# EAGLE board Atividade - Semáforo de cruzamento (EAGLE 9.7.0)

Size 156.79 x 68.76 mm. Coordinates in mm from the lower left corner, seen from the top.
Outline: 0,0 156.79,0 156.79,68.76 0,68.76 0,0
Copper layers (1*16): Top 0.035mm / dielectric 1.5mm / Bottom 0.035mm
Design rules "default": minimum track width 6mil, minimum drill 0.35mm, track to track 6mil, track to pad 6mil, pad to pad 6mil, via to via 6mil, smd to smd 6mil, copper to edge 40mil, drill to drill 6mil, minimum pad ring 10mil, minimum via ring 8mil, stop-mask expansion 4mil, vias tented up to drill 0mil, thermal gap 10mil

## Footprints (pad centres in the part's own frame; a part is rotated, then mirrored left to right if it is on the bottom)
LEDRD254W60D565H860B_G = drill 0.981 pad 1.581: 1 -1.27,0; 2 1.27,0
LEDRD254W60D565H860B_Y = drill 0.981 pad 1.581: 1 -1.27,0; 2 1.27,0
LEDRD254W60D565H860B = drill 0.981 pad 1.581: 1 -1.27,0; 2 1.27,0
RESAD1016W63L850D250B = drill 0.83 pad 1.43: 1 -5.08,0; 2 5.08,0
ARDUINO-UNO-R3-SHIELD = drill 1.016 pad 1.88: 3.3V 24.13,-2.54; 5V 24.13,0; A0 24.13,12.7; A1 24.13,15.24; A2 24.13,17.78; A3 24.13,20.32; A4 24.13,22.86; A5 24.13,25.4; AREF -24.13,-13.97; D2 -24.13,20.32; D3 -24.13,17.78; D4 -24.13,15.24; D5 -24.13,12.7; D6 -24.13,10.16; D7 -24.13,7.62; D8 -24.13,3.81; D9 -24.13,1.27; D10 -24.13,-1.27; D11 -24.13,-3.81; D12 -24.13,-6.35; D13 -24.13,-8.89; GND@0 24.13,2.54; GND@1 24.13,5.08; GND@2 -24.13,-11.43; IOREF 24.13,-7.62; NC 24.13,-10.16; RES 24.13,-5.08; RX -24.13,25.4; SCL -24.13,-19.05; SDA -24.13,-16.51; TX -24.13,22.86; VIN 24.13,7.62

## Placement (x,y rotation side)
D4  GREEN  [LEDRD254W60D565H860B_G]  140.2,62.7 270 top
D5  YELLOW  [LEDRD254W60D565H860B_Y]  137.66,57.62 270 top
D6  RED  [LEDRD254W60D565H860B]  135.12,52.54 270 top
D9  GREEN  [LEDRD254W60D565H860B_G]  140.2,37.3 270 top
D10  RED  [LEDRD254W60D565H860B]  140.2,32.22 270 top
DLEDPEDES1_VERDE  GREEN  [LEDRD254W60D565H860B_G]  119.88,37.3 270 top
DLEDPEDES1_VERMELHO  RED  [LEDRD254W60D565H860B]  119.88,32.22 270 top
DLEDSEMA1_AMARELO  YELLOW  [LEDRD254W60D565H860B_Y]  119.88,57.62 270 top
DLEDSEMA1_VERDE  GREEN  [LEDRD254W60D565H860B_G]  119.88,62.7 270 top
DLEDSEMA1_VERMELHO  RED  [LEDRD254W60D565H860B]  122.42,52.54 270 top
R2  220  [RESAD1016W63L850D250B]  112.26,61.43 180 top
R3  220  [RESAD1016W63L850D250B]  112.26,56.35 180 top
R4  220  [RESAD1016W63L850D250B]  112.26,51.27 180 top
R5  220  [RESAD1016W63L850D250B]  112.26,36.03 180 top
R6  220  [RESAD1016W63L850D250B]  112.26,30.95 180 top
R7  220  [RESAD1016W63L850D250B]  147.82,61.43 180 top
R8  220  [RESAD1016W63L850D250B]  147.82,56.35 180 top
R9  220  [RESAD1016W63L850D250B]  147.82,51.27 180 top
R10  220  [RESAD1016W63L850D250B]  147.82,36.03 180 top
R11  220  [RESAD1016W63L850D250B]  147.82,30.95 180 top
U1  ARDUINO-UNO-R3-SHIELD  [ARDUINO-UNO-R3-SHIELD]  47.88,29.84 270 top

## Library data of the parts
D4 D9 DLEDPEDES1_VERDE DLEDSEMA1_VERDE = Tinkercad; CATEGORY: Opto-Electronic; SUB-CATEGORY: LED; VALUE: LED_GREEN
D5 DLEDSEMA1_AMARELO = Tinkercad; CATEGORY: Opto-Electronic; SUB-CATEGORY: LED; VALUE: LED_YELLOW
D6 D10 DLEDPEDES1_VERMELHO DLEDSEMA1_VERMELHO = Tinkercad; CATEGORY: Opto-Electronic; SUB-CATEGORY: LED; VALUE: LED_RED
R2-R11 U1 = Tinkercad

## Nets
D4_C: D4.2 R7.2
D5_C: D5.2 R8.2
D6_C: D6.2 R9.2
D9_C: D9.2 R10.2
D10_C: D10.2 R11.2
DLEDPEDES1_VERDE_C: DLEDPEDES1_VERDE.2 R5.1
DLEDPEDES1_VERMELHO_C: DLEDPEDES1_VERMELHO.2 R6.1
DLEDSEMA1_AMARELO_C: DLEDSEMA1_AMARELO.2 R3.1
DLEDSEMA1_VERDE_C: DLEDSEMA1_VERDE.2 R2.1
DLEDSEMA1_VERMELHO_C: DLEDSEMA1_VERMELHO.2 R4.1
U1_D2: DLEDSEMA1_VERDE.1 U1.D2
U1_D3: DLEDSEMA1_AMARELO.1 U1.D3
U1_D4: DLEDSEMA1_VERMELHO.1 U1.D4
U1_D5: DLEDPEDES1_VERDE.1 U1.D5
U1_D6: DLEDPEDES1_VERMELHO.1 U1.D6
U1_D7: D4.1 U1.D7
U1_D8: D5.1 U1.D8
U1_D9: D6.1 U1.D9
U1_D10: D9.1 U1.D10
U1_D11: D10.1 U1.D11
U1_GND: R2.2 R3.2 R4.2 R5.2 R6.2 R7.1 R8.1 R9.1 R10.1 R11.1 U1.GND@0 U1.GND@1 U1.GND@2

## Tracks (layer width: path | path; a pad name or v marks a point on that pad's centre or on a via)
D4_C  (1 unrouted)
D5_C  (1 unrouted)
D6_C  (1 unrouted)
D9_C  (1 unrouted)
D10_C  (1 unrouted)
DLEDPEDES1_VERDE_C  (1 unrouted)
DLEDPEDES1_VERMELHO_C  (1 unrouted)
DLEDSEMA1_AMARELO_C  (1 unrouted)
DLEDSEMA1_VERDE_C  (1 unrouted)
DLEDSEMA1_VERMELHO_C  (1 unrouted)
U1_D2  (1 unrouted)
U1_D3  (1 unrouted)
U1_D4  (1 unrouted)
U1_D5  (1 unrouted)
U1_D6  (1 unrouted)
U1_D7  (1 unrouted)
U1_D8  (1 unrouted)
U1_D9  (1 unrouted)
U1_D10  (1 unrouted)
U1_D11  (1 unrouted)
U1_GND  (12 unrouted)